# Altium PCB C-POWER.PcbDoc
Units mil, origin at the board's own origin, x right, y up, seen from the top; angles counter-clockwise.
Board outline 2956.75 x 2283.46 mil, 4 copper layers (Top Layer, power, GND, Bottom Layer), stack 23.078 mil thick; 72 components, 39 nets, 229 pads, 113 vias.
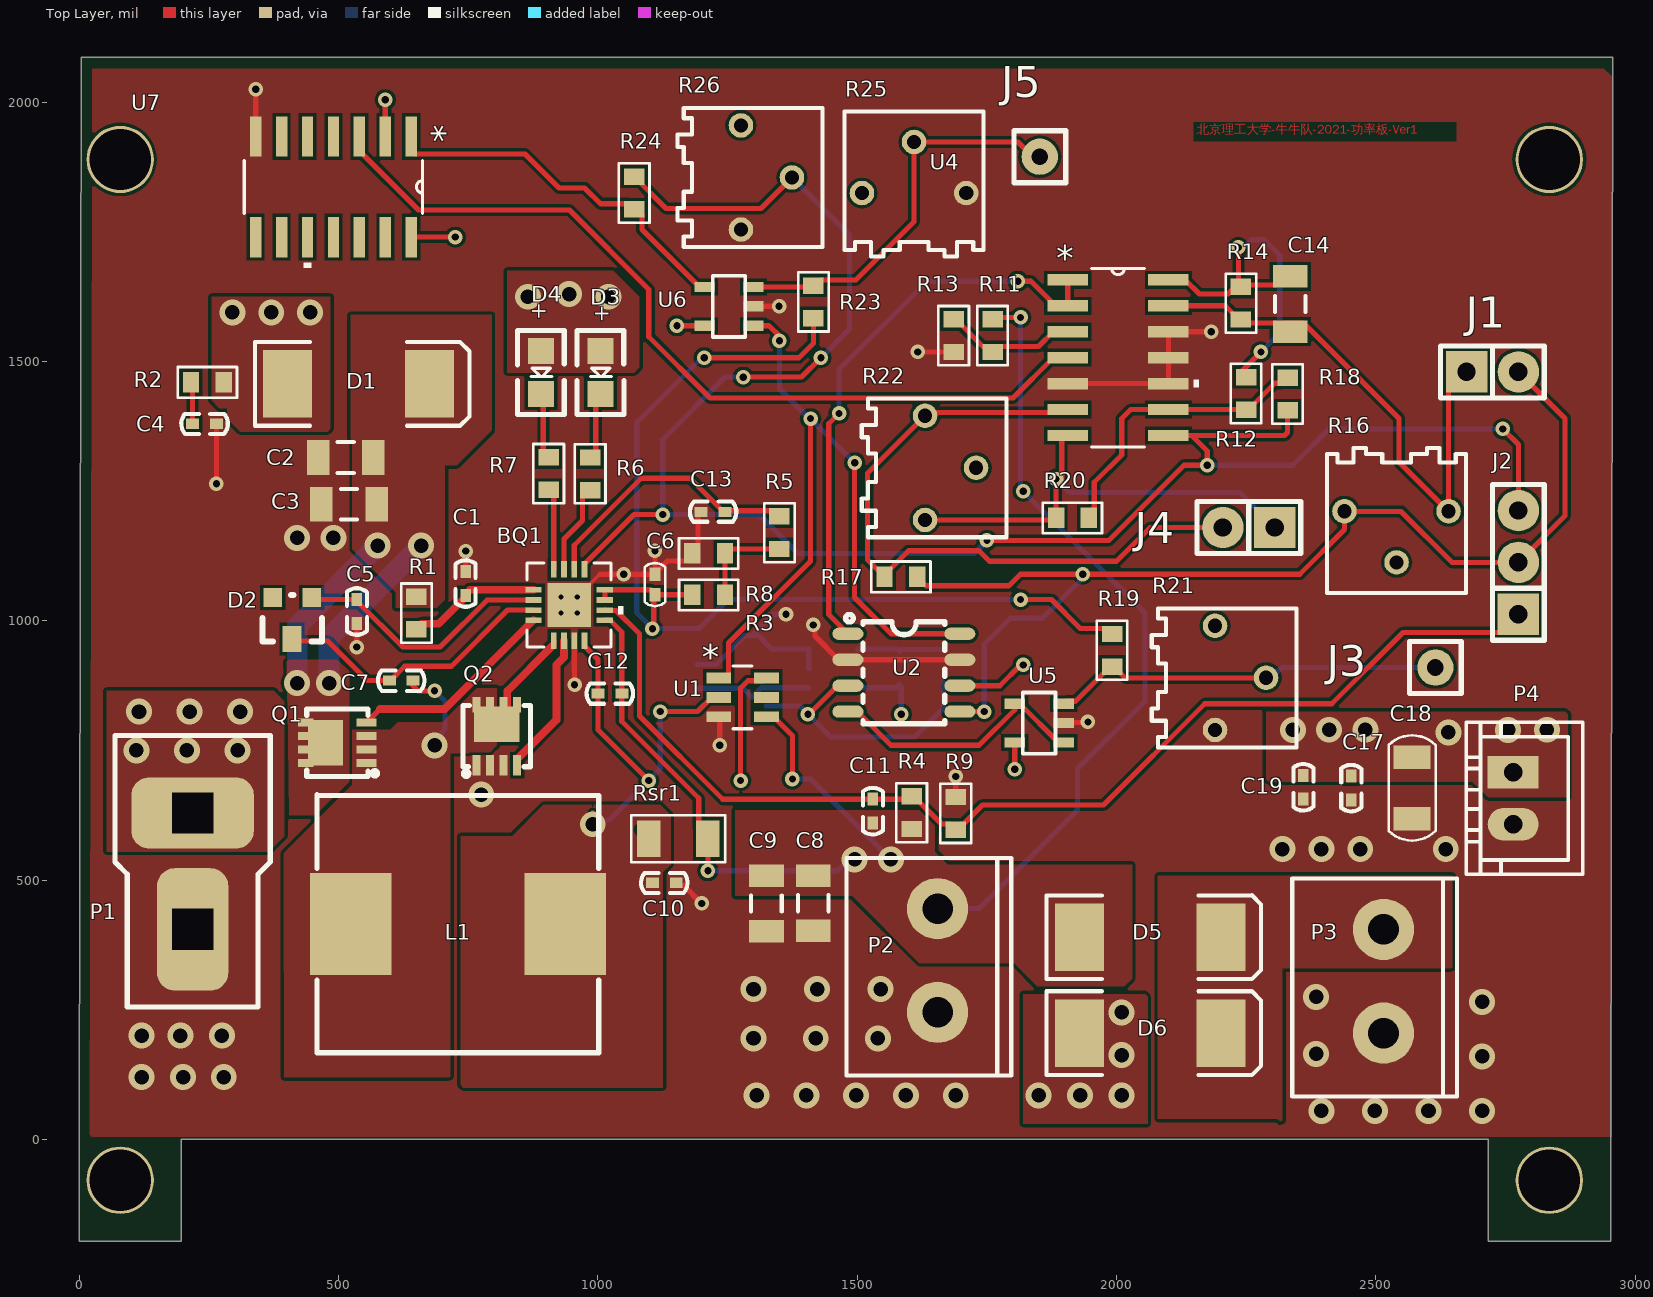
[diagram p0: Top Layer view]
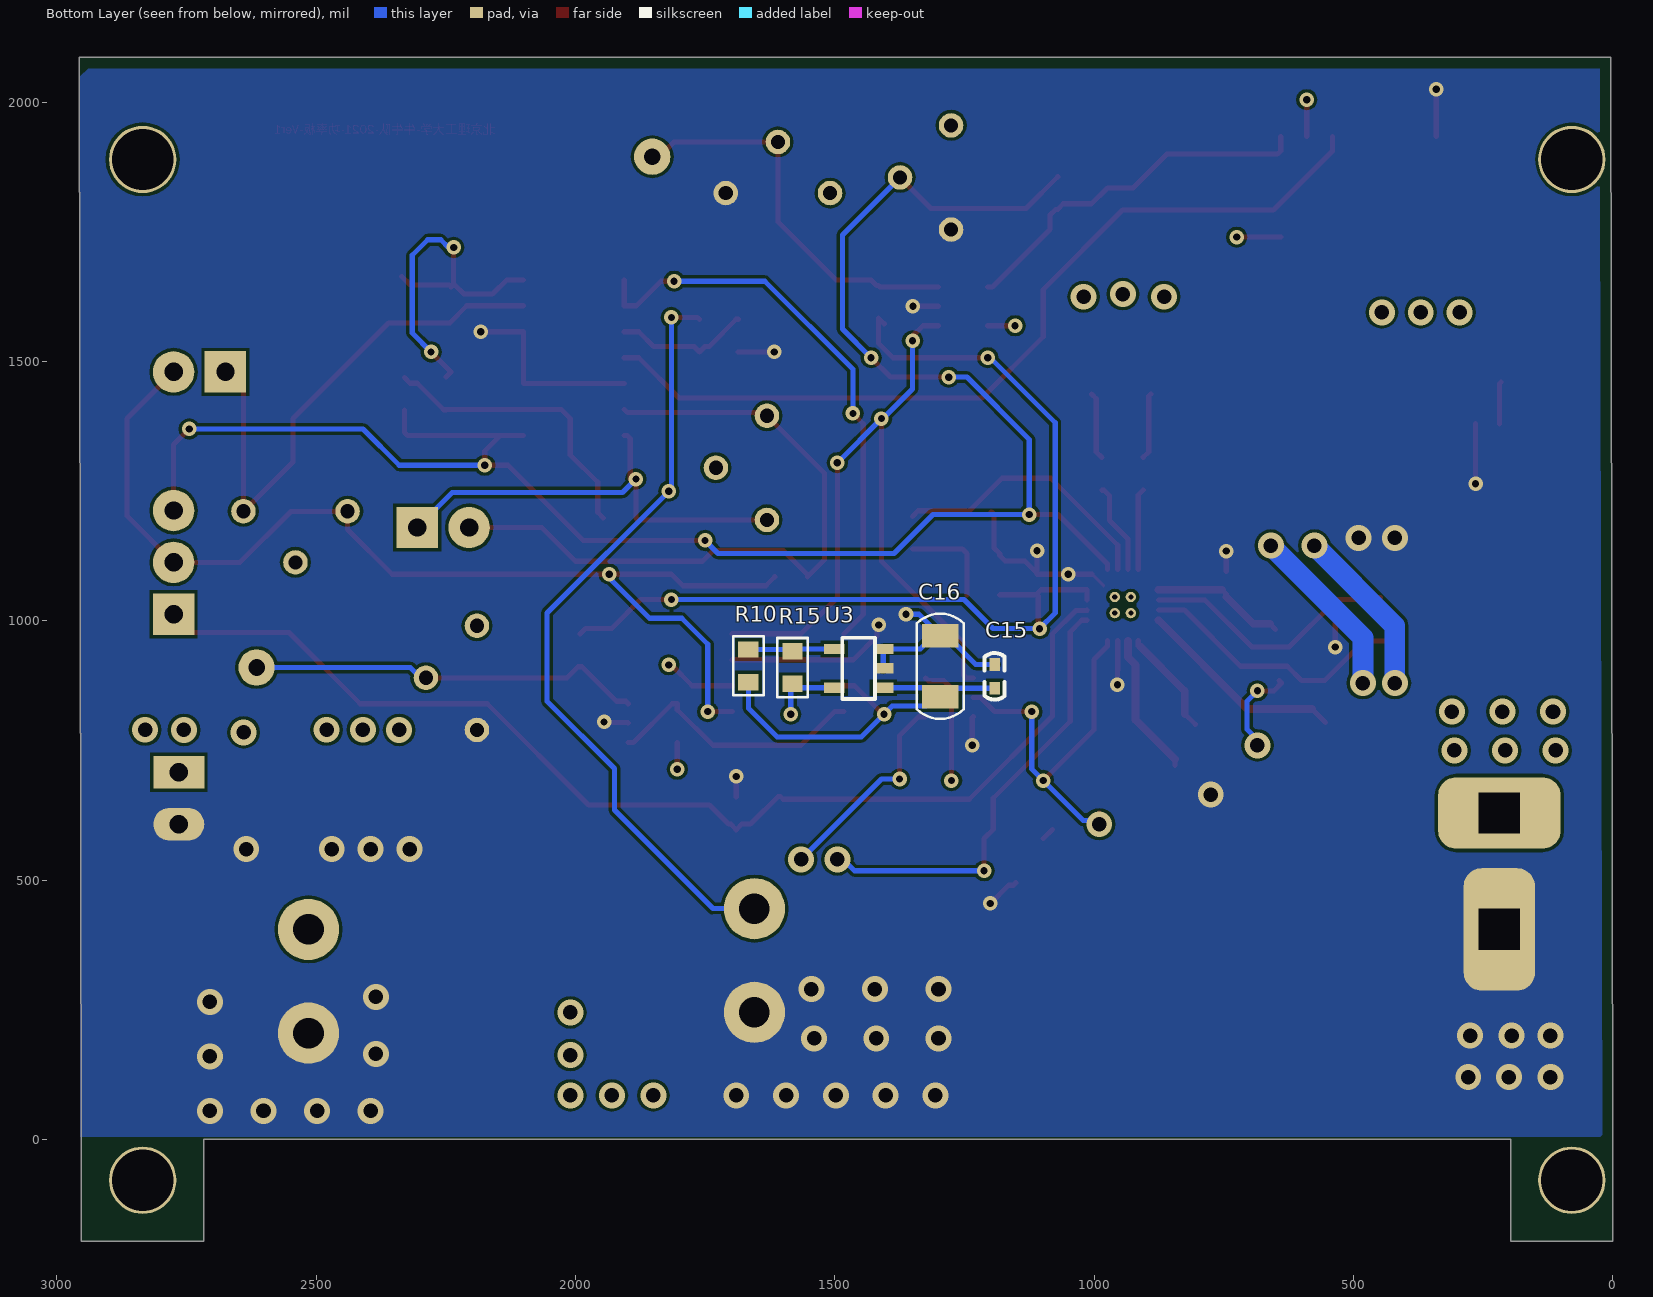
[diagram p1: Bottom Layer view, seen from below]
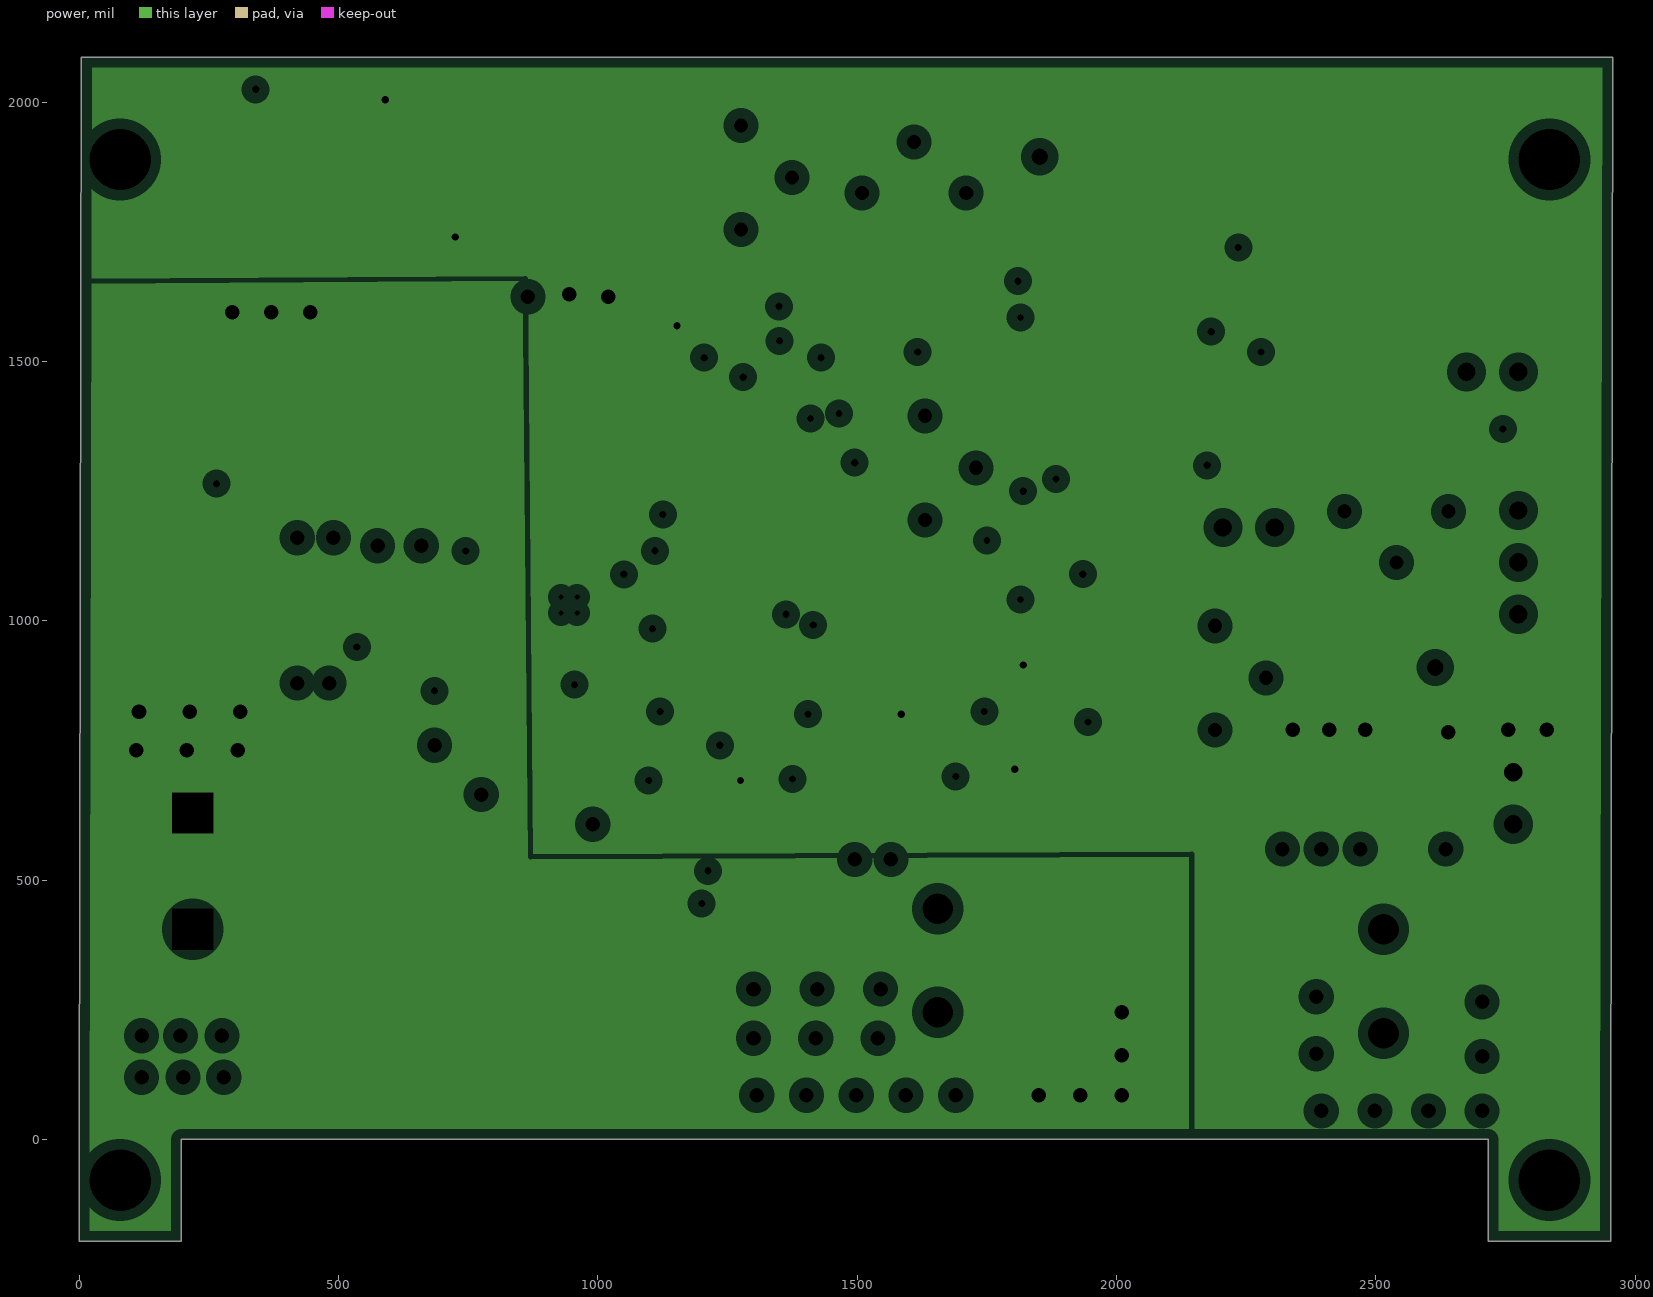
[diagram p2: power, clearances drawn from the general rule]
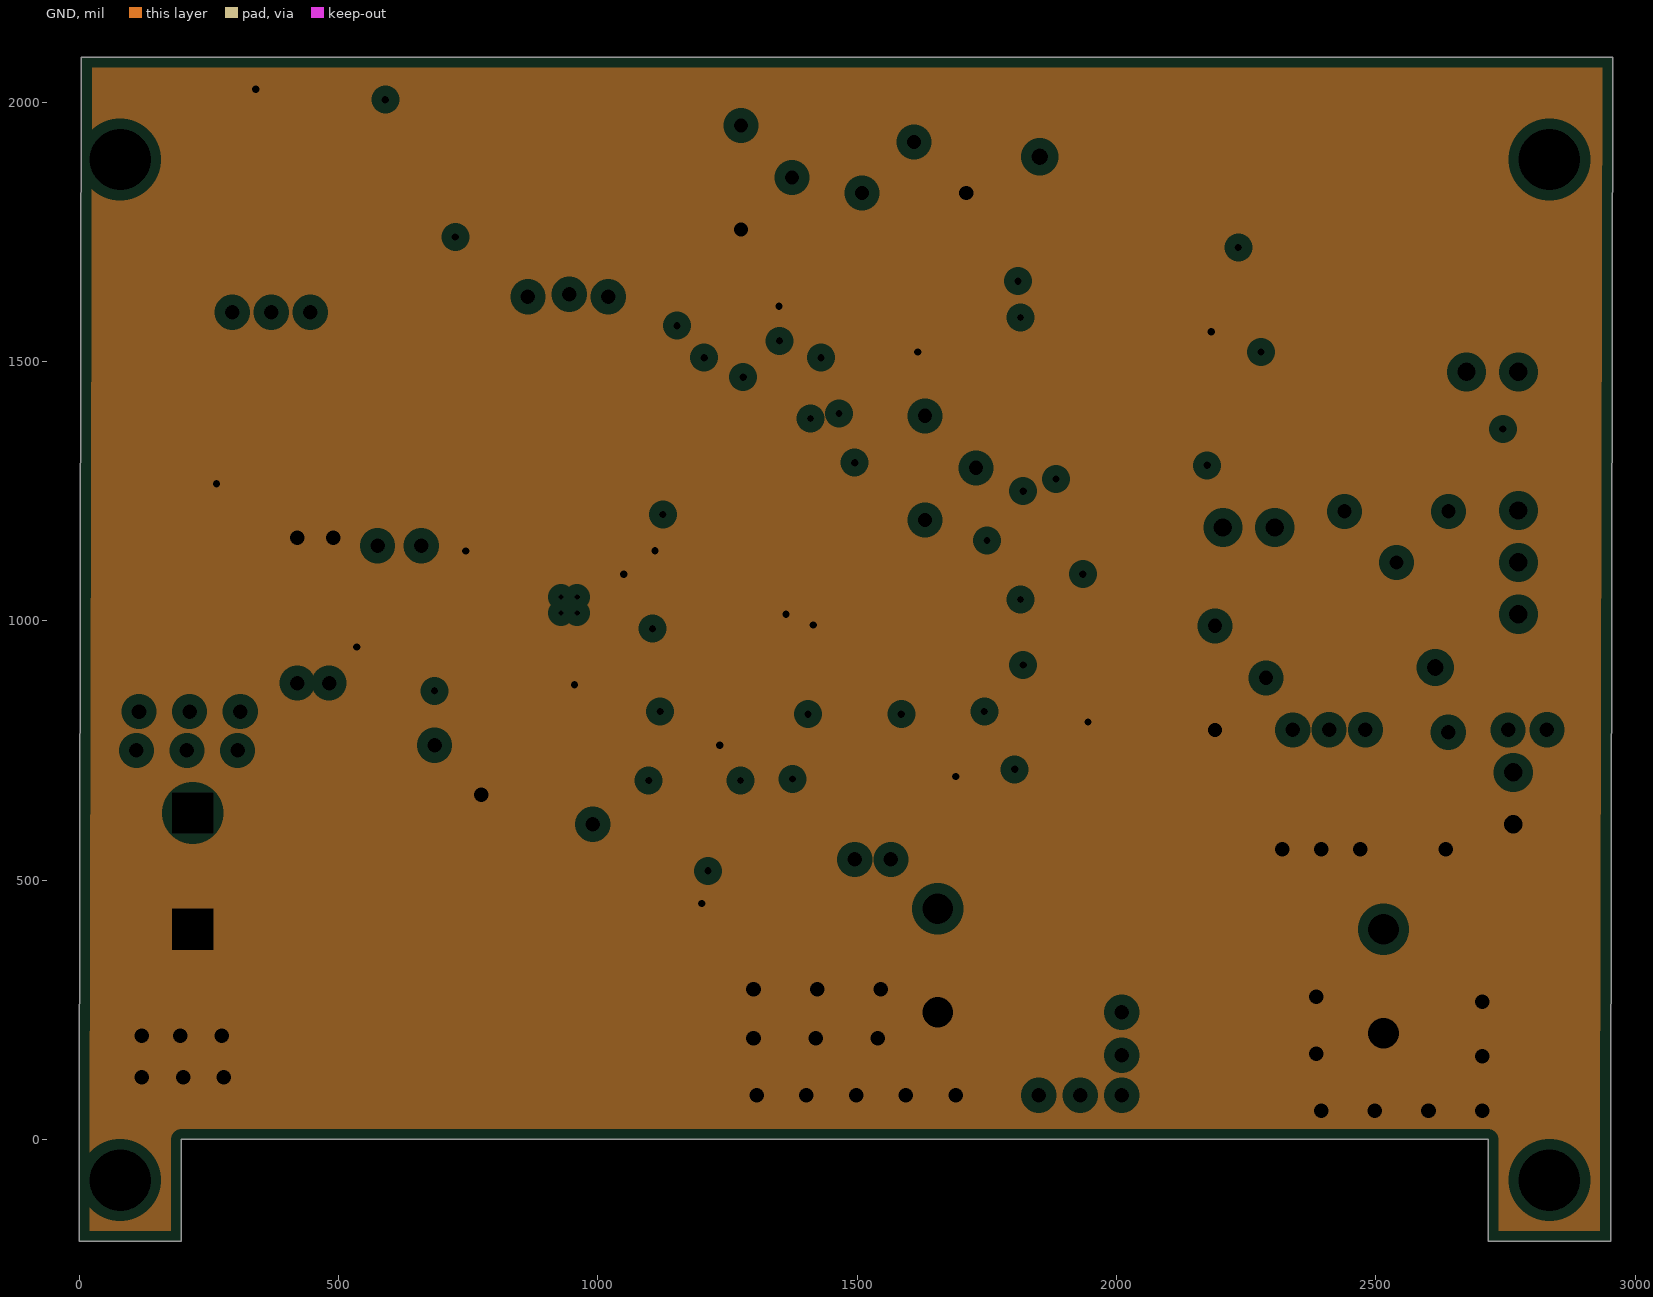
[diagram p3: GND, clearances drawn from the general rule]

## Layer stack, top to bottom
Top Solder: solder mask 0.4, Solder Resist, Dk 3.5
Top Layer: signal copper 1.4
Dielectric 2: prepreg 2.8, PP-006, Dk 4.1
power: plane copper 0.7, net (Multiple Nets)
Dielectric 3: prepreg 2.8, PP-006, Dk 4.1
GND: plane copper 1.3778, net GND
Dielectric 1: dielectric 12.6, FR-4, Dk 4.8
Bottom Layer: signal copper 1.4
Bottom Solder: solder mask 0.4, Solder Resist, Dk 3.5

## Board outline
0,-196.85 0,0 3.99,2086.61 2956.75,2086.61 2952.76,0 2952.76,-196.85 2716.54,-196.85 2716.54,0 196.85,0 196.85,-196.85

## Design rules (kind name [scope] priority, off if disabled: settings)
Clearance [All] p1: gap=6 ignorepadtopadclearanceinfootprint=TRUE
HoleSize [All] p1: absolutevalues=TRUE maxlimit=2000 minlimit=1 maxpercent=80.000 minpercent=20.000
HoleToHoleClearance [All] p1: gap=2 allowstackedmicrovias=TRUE
MinimumSolderMaskSliver [All] p1: minsoldermaskwidth=0
PlaneClearance [All] p1: clearance=20
PlaneConnect [All] p1: planeconnectstyle=Direct reliefexpansion=20 reliefentries=4 reliefconductorwidth=10 reliefairgap=10
PolygonConnect [All] p1: connectstyle=Direct reliefconductorwidth=10 reliefentries=4 polygonreliefangle="90 Angle" airgapwidth=10
RoutingVias [All] p1: holewidth=14 width=28 viastyle="Through Hole" minholewidth=6 minwidth=6 maxholewidth=28 maxwidth=50
SilkToSilkClearance [All] p1: silktosilkclearance=2
SilkToSolderMaskClearance [IsPad] p1: minsilkscreentomaskgap=2 clearancetoexposedcopper=TRUE
SolderMaskExpansion [All] p1: expansion=4
Width [All] p1: maxlimit=200 minlimit=6 preferedwidth=10 minimp=50.000000 maximp=50.000000 favimp=50.000000
23 further rules are at their usual default settings.

## Components (designator, comment, footprint, x,y, rotation, side; value= is the part's Value field where it differs from the comment)
BQ1 "BQ24640" RVA16_2P14X2P14 944.5,1030.5 r0 top locked
C1 "Cap" C0402 745,1050 r90 top value=1uF
C2 "Cap" C1206 513.4,1315 r0 top value=10uF
C3 "Cap" C1206 520,1225 r0 top value=10uF
C4 "Cap" C0402 263.41,1380 r180 top value=2.2uF
C5 "Cap" C0402 535,1040 r270 top value=1uF
C6 "Cap" 0402-C 1110,1070 r270 top value=1uF
C7 "Cap" C0402 642.62,885 r180 top value=0.1uF
C8 "Cap" C1206 1415.47,455.71 r90 top value=22uF
C9 "Cap" C1206 1325,455 r90 top value=22uF
C10 "Cap" C0402 1150,495 r180 top value=0.1uF
C11 "Cap" C0402 1530,655 r270 top value=22pF
C12 "Cap" C0402 1045,860 r180 top value=0.1uF
C13 "Cap" C0402 1200,1210 r0 top value=0.1uF
C14 "Cap" C1206 2335,1611 r90 top value=10uF
C15 "Cap" C0402 1191.6,871 r90 bottom value=0.1uF
C16 "Cap" 1206-C 1296.6,912.46 r90 bottom value=22uF
C17 "Cap" C0402 2452.5,699.43 r270 top value=0.1uF
C18 "Cap" 1206-C 2570,677.75 r270 top value=22uF
C19 "Cap" C0402 2360,701 r270 top value=0.1uF
D1 "D Schottky" SMC 538.4,1456.91 r0 top
D2 "D Schottky" SOT-23 448,1045 r180 top
D3 "LED0" LED0805 1004.8,1520 r270 top
D4 "LED0" LED0805 890,1520 r270 top
D5 "D Schottky" SMC 2065,390 r0 top
D6 "D Schottky" SMC 2065,205 r0 top
J1 "PIN2" SIP2 2675,1480 r0 top
J2 "PIN3" SIP3 2775,1012.69 r90 top
J3 "PIN1" SIP1 2615,910 r0 top
J4 "PIN2" SIP2 2305.18,1180 r180 top
J5 "PIN1" SIP1 1852.05,1895 r0 top
L1 "Inductor" IND-SMD_L13.8-W12.6_MHCC12050 730,415 r0 top value=3.3uH
P1 "Header 2" PCBComponent_1 368.02,779.02 r180 top
P2 "Header 2" 2PIN-5.08B 1655,445 r270 top
P3 "Header 2" 2PIN-5.08B 2515,405 r270 top
P4 "MHDR1X2" XH2-2.54 2765,657.75 r270 top
Q1 "NMOS-2" POWERPAK-1212-8_L3.0-W3.0-P0.65-LS3.3-BL 495,765 r90 top
Q2 "NMOS-2" POWERPAK-1212-8_L3.0-W3.0-P0.65-LS3.3-BL 805,780 r0 top
R1 "Res2" 0603-R 650,1015 r90 top value=10R
R2 "Res2" 0603-R 246.92,1460 r0 top value=2R
R3 "Res2" 0603-R 1213.5,1050 r0 top value=9.31K
R4 "Res2" 0603-R 1605,630 r90 top value=570K
R5 "Res2" 0603-R 1350,1170 r270 top value=100R
R6 "Res2" 0603-R 985,1283.5 r90 top value=16K
R7 "Res2" 0603-R 905,1284 r90 top value=16K
R8 "Res2" 0603-R 1213.5,1130 r180 top value=180K
R9 "Res2" 0603-R 1690,628.69 r90 top value=50K
R10 "Res2" 0603-R 1666.6,913.4 r270 bottom value=1k
R11 "Res2" 0603-R 1761,1550 r270 top value=510K
R12 "Res2" 0603-R 2250,1438.5 r270 top value=1K
R13 "Res2" 0603-R 1686,1550 r270 top value=100K
R14 "Res2" 0603-R 2240,1612.5 r270 top value=1M
R15 "Res2" 0603-R 1581.6,909.9 r90 bottom value=1k
R16 "Res Tap" 3362P 2540,1161.9 r180 top value=100K
R17 "Res2" 0603-R 1584.16,1085 r180 top value=1K
R18 "Res2" 0603-R 2330,1437.5 r90 top value=1K
R19 "Res2" 0603-R 1991.5,943.11 r90 top value=5.1K
R20 "Res2" 0603-R 1915,1198.5 r0 top value=1K
R21 "Res Tap" 3362P 2239.21,890 r270 top value=20K
R22 "Res Tap" 3362P 1680,1295 r270 top value=20K
R23 "Res2" 0603-R 1415.47,1615 r270 top value=5K
R24 "Res2" 0603-R 1070,1825 r270 top value=68K
R25 "Res Tap" 3362P 1609.61,1874.21 r0 top value=20K
R26 "Res Tap" 3362P 1325,1855 r270 top value=20K
Rsr1 "Res2" 1206-R 1155,580 r180 top value=10m
U1 "LMP8640MK-F/NOPB" MK06A 1279,852.4 r0 top
U2 "SOIP" SOIC-8_L4.9-W3.9-P1.27-LS6.0-TL 1590,900 r0 top
U3 "TS951LT" SOT23-5 1406.6,871 r90 bottom
U4 "TL064CD" D14 2003,1507.5 r0 top locked
U5 "TS951LT" SOT23-5 1898.17,765.35 r90 top
U6 "LM397MF" SOT23-5 1300,1569.09 r90 top
U7 "CD4011BM" D14 490,1837 r270 top

## Footprints (in the part's own frame and the unit in brackets; to place one, negate y for a bottom-side part, rotate by r counter-clockwise, add the part's x,y. Pads: shape width x height; smd on the part's side, far side on the other; paste and mask are expansions set on the pad)
2PIN-5.08B [mm] "3A"
  round 3 hole 1.5: 1(0,0) 2(5.08,0)
  silkscreen extent -2.49,-4.47 8.18,3.61, body extent -2.48,-4.58 8.12,3.02, height 10
0402-C [mm]
  rect 0.65x0.55 smd: 1(-0.5,0) 2(0.5,0)
  silkscreen extent -1.06,-0.5 1.06,0.5
0603-R [mm]
  rect 0.8x1 smd: 1(-0.8,0) 2(0.8,0)
  silkscreen extent -1.45,-0.75 1.45,0.75
1206-C [mm]
  rect 1.15x1.8 smd: 1(-1.5,0) 2(1.5,0)
  silkscreen extent -2.58,-1.15 2.58,1.15
1206-R [mm]
  rect 1.15x1.8 smd: 1(-1.45,0) 2(1.45,0)
  silkscreen extent -2.3,-1.15 2.3,1.15
3362P [mm]
  round 1.2 hole 0.7: 1(-2.55,-1.25) 2(0,1.25) 3(2.55,-1.25)
  silkscreen extent -3.4,-4.35 3.4,2.75
C0402 [mil]
  rect 25x20 smd: 1(-1,0) 2(45,0)
  silkscreen extent -23,-19 67,20, body extent 2,-10 42,10, height 20
C1206 [mm] "Chip Capacitor, Body 3.2x1.6mm, IPC High Density"
  rect 1.1x1.7 smd: 1(-1.35,0) 2(1.35,0)
  silkscreen extent -0.4,-0.75 0.4,0.75, body extent -1.7,-0.9 1.7,0.9, height 1.3
D14 [mil]
  rect 78x22 smd: 1(-97,150) 2(-97,100) 3(-97,50) 4(-97,0) 5(-97,-50) 6(-97,-100) 7(-97,-150) 8(97,-150) 9(97,-100) 10(97,-50) 11(97,0) 12(97,50) 13(97,100) 14(97,150)
  silkscreen extent -51,-172 156,172, body extent 0,0 10,10, height 10
IND-SMD_L13.8-W12.6_MHCC12050 [mm]
  rect 4x5 smd: 1(-5.25,0) 2(5.25,0)
  silkscreen extent -6.9,-6.3 6.9,6.35
LED0805 [mil] "1/8W"
  rect 50x50 smd: 1(0,0) 2(82.3,0.2)
  silkscreen extent -40,-45 122,45, body extent 2,-25 80,25, height 20
MK06A [mil]
  rect 48x21 smd: 1(-46,37.4) 2(-46,0) 3(-46,-37.4) 4(46,-37.4) 5(46,0) 6(46,37.4)
  silkscreen extent -18,-60 18,60, body extent 0,0 10,10, height 10
PCBComponent_1 [mm]
  rrect50% 6x3.5 hole 2 square: 1(3.8,3.8)
  rrect50% 3.5x6 hole 2 square: 2(3.8,9.5)
  silkscreen extent 0,0 7.6,13.3
POWERPAK-1212-8_L3.0-W3.0-P0.65-LS3.3-BL [mil]
  rect 16x39 smd: 1(39,-58.5) 3(-39,-58.5) 3(-13,-58.5) 3(13,-58.5)
  rect 16x30 smd: 2(-39,58.5) 2(-13,58.5) 2(13,58.5) 2(39,58.5)
  rect 88x68 smd: 2(0,20.5)
  silkscreen extent -65,-80 65,57
RVA16_2P14X2P14 [mm]
  rect 0.8x0.28 smd paste-0.14: 1(-1.75,0.75) 2(-1.75,0.25) 3(-1.75,-0.25) 4(-1.75,-0.75) 9(1.75,-0.75) 10(1.75,-0.25) 11(1.75,0.25) 12(1.75,0.75)
  rect 0.28x0.8 smd paste-0.14: 5(-0.75,-1.75) 6(-0.25,-1.75) 7(0.25,-1.75) 8(0.75,-1.75) 13(0.75,1.75) 14(0.25,1.75) 15(-0.25,1.75) 16(-0.75,1.75)
  rect 2.14x2.14 smd paste-1.057 mask-1.054: 17(0,0)
  round 0.508 hole 0.254: V(-0.394,-0.394) V(-0.394,0.394) V(0.394,-0.394) V(0.394,0.394)
  silkscreen extent -2.06,-2.06 2.66,2.06, body extent 0,0 0.25,0.25, height 0.25
SIP1 [mil]
  round 70 hole 32: 1(0,0)
  silkscreen extent -50,-50 50,50
SIP2 [mil]
  rect 80x80 hole 35.43: 1(0,0)
  round 80 hole 35.43: 2(100,0)
  silkscreen extent -50,-50 150,50
SIP3 [mil]
  rect 80x80 hole 35.43: 1(0,0)
  round 80 hole 35.43: 2(100,0) 3(200,0)
  silkscreen extent -50,-50 250,50
SMC [mm] "DO-214-AB/SMC; 2 C-Bend Leads; Body 7.9 x 5.9 mm, inc. leads (LxW)"
  rect 2.4x3.3 smd: 1(-3.475,0) 2(3.475,0)
  silkscreen extent -5.07,-2.05 5.43,2.05
SOIC-8_L4.9-W3.9-P1.27-LS6.0-TL [mm]
  oval 1.52x0.6 smd: 1(-2.74,1.905) 2(-2.74,0.635) 3(-2.74,-0.635) 4(-2.74,-1.905) 5(2.74,-1.905) 6(2.74,-0.635) 7(2.74,0.635) 8(2.74,1.905)
  silkscreen extent -2.86,-2.5 2,2.86
SOT23-5 [mm]
  rect 0.5x1 smd: 1(0,0) 2(0.95,0) 3(1.9,0) 4(1.9,2.4) 5(0,2.4)
  silkscreen extent -0.55,0.4 2.45,2, body extent -0.5,-0.2 2.4,2.6, height 1.09
SOT-23 [mil]
  rect 36x36 smd: 1(0,0) 2(75,0)
  rect 36x50 smd: 3(38,80)
  silkscreen extent -20,-5 95,85
XH2-2.54 [mm]
  rect 1.6x2.5 hole 0.9: 1(-1.27,0)
  oval 1.6x2.5 hole 0.9: 2(1.27,0)
  silkscreen extent -3.72,-2.3 3.72,3.4

## Part data
C1 C2 C3 C4 C5 C6 C7 C8 C9 C10 C11 C12 C13 C14 C15 C16 C17 C18 C19: "Capacitor", LatestRevisionDate=17-Jul-2002, LatestRevisionNote="Re-released for DXP Platform.", PackageDescription="Radial Cap, Thru-Hole; 2 Leads; 0.3 in Pin Spacing", PackageReference=RAD-0.3, Published=8-Jun-2000, Publisher="Altium Limited"
D1: "MBRS540T3G", Code_JEDEC=DO-214-AA, LatestRevisionDate=17-Jul-2002, LatestRevisionNote="Re-released for DXP Platform.", PackageDescription="DO-214-AA/SMB; 2 C-Bend Leads; Body 5.3 x 3.6 mm, inc. leads (LxW)", PackageReference=SMB, Published=8-Jun-2000, Publisher="Altium Limited"
D2: "Schottky Diode", Code_JEDEC=DO-214-AA, LatestRevisionDate=17-Jul-2002, LatestRevisionNote="Re-released for DXP Platform.", PackageDescription="DO-214-AA/SMB; 2 C-Bend Leads; Body 5.3 x 3.6 mm, inc. leads (LxW)", PackageReference=SMB, Published=8-Jun-2000, Publisher="Altium Limited"
D3 D4: "Typical INFRARED GaAs LED", LatestRevisionDate=08-Jul-2005, LatestRevisionNote="Mech Layer 1 removed.", PackageDescription="LED; 2 Leads", PackageReference=LED-0, Published=8-Jun-2000, Publisher="Altium Limited"
D5 D6: "SK86C", Code_JEDEC=DO-214-AA, LatestRevisionDate=17-Jul-2002, LatestRevisionNote="Re-released for DXP Platform.", PackageDescription="DO-214-AA/SMB; 2 C-Bend Leads; Body 5.3 x 3.6 mm, inc. leads (LxW)", PackageReference=SMB, Published=8-Jun-2000, Publisher="Altium Limited"
P1 P2 P3 P4: "Header, 2-Pin", LatestRevisionDate=17-Jul-2002, LatestRevisionNote="Re-released for DXP Platform.", Publisher="Altium Limited"
Q1 Q2: "N-Channel Power MOSFET", ComponentLink1Description="Manufacturer Link", ComponentLink1URL=http://www.irf.com/, DatasheetVersion=PD-9.814, LatestRevisionDate=17-Jul-2002, LatestRevisionNote="Re-released for DXP Platform.", Note="Pin 2 is electrically connected to pin 4.", PackageDescription="TO, Thru-Hole, Vertical, Heatsink Mounted; 3 In-Line Leads; Pitch 2.54 mm", PackageReference=TO-220AB, PackageVersion=Feb-1997, Published=8-Jun-2000, Publisher="Altium Limited"
R1 R2 R3 R4 R5 R6 R7 R8 R9 R10 R11 R12 R13 R14 R15 R17 R18 R19 R20 R23 R24 Rsr1: "Resistor", LatestRevisionDate=17-Jul-2002, LatestRevisionNote="Re-released for DXP Platform.", PackageDescription="Axial Device, Thru-Hole; 2 Leads; 0.4 in Pin Spacing", PackageReference=AXIAL-0.4, Published=8-Jun-2000, Publisher="Altium Limited"
R16 R21 R22 R25 R26: "Tapped Resistor", LatestRevisionDate=17-Jul-2002, LatestRevisionNote="Re-released for DXP Platform.", PackageDescription="Variable Resistor, Thru-Hole; 3 Leads", PackageReference=VR3, Published=24-Mar-1999, Publisher="Altium Limited", Set Position=0.5, Sim Note="Enter the Resistance value and the set point into parameter fields."
U1: "Precision High Voltage Current Sense Amplifier", Manufacturer="Texas Instruments", NSC_PackageReference=MK06A, basePN=LMP8640, Copyright="Copyright (C) 2018 Accelerated Designs. All rights reserved", DatasheetURL=http://www.ti.com/lit/ds/symlink/lmp8640.pdf, Manufacturer_Part_Number=LMP8640MK-F/NOPB, RefDes=RefDes, Type=DEV, Vendor="Texas Instruments"
U2: library part AD633, "乘法器"
U3 U5: library part OPA349
U4: "Quad Low-Power JFET-Input General-Purpose Operational Amplifier", Manufacturer="Texas Instruments", PACKAGE_DESIGNATOR=D, Copyright="Copyright (C) 2018 Accelerated Designs. All rights reserved", Datasheet_URL=http://www.ti.com/lit/gpn/TL064, FAMILY_NAME="STANDARD LINEAR AMPLIFIER", GENERIC_PART_NUMBER=TL064, INDUSTRY_STD_PKG_TYPE=SOIC, PIN_COUNT=14, RefDes=RefDes, Type=DEV
U6: "No Description Available", Manufacturer=NationalSemiconductor, Characteristics=LM397MFSingleGeneralPurposeComparator, ComponentLink1DescBC=LM397Datasheet, ComponentLink1URL=http//wwwnationalcom/ds/LM/LM397pdf, ComponentLink2DescA4=LM397WebPage, ComponentLink2URL=http//wwwnationalcom/pf/LM/LM397html, ComponentLink3DescAC=MF05APackageWebPage, ComponentLink3URL=http//wwwnationalcom/packaging/folders/mf05ahtml, CompType=ComparatorIC, Copyright="Copyright (C) 2018 Accelerated Designs. All rights reserved", LatestRevisionDate=2009-03-16, LatestRevisionNote=MassUpdate, PackageDescription=5LeadSOT-23, PackageReference=MF05A_L, PartNumber=LM397MF, Published=2009-03-16, Publisher=NationalSemiconductor, RoHS=O, SymbolVersion=2008-07-09, TaMax_C=850, TaMin_C=-400, Version=B1608
U7: "CMOS Quad 2-Input NAND Gate", Manufacturer="Texas Instruments", PACKAGE_DESIGNATOR=D, Copyright="Copyright (C) 2018 Accelerated Designs. All rights reserved", Datasheet_URL=http://www.ti.com/lit/gpn/CD4011B, FAMILY_NAME="NAND GATE", GENERIC_PART_NUMBER=CD4011B, INDUSTRY_STD_PKG_TYPE=SOIC, PIN_COUNT=14, RefDes=RefDes, Type=DEV
L1: Code_IEC=1005, Code_JEITA=0402, LatestRevisionDate=29-May-2009, LatestRevisionNote="IPC-7351 Footprint Added.", PackageDescription="Chip Inductor", PackageReference=0402-A, Published=8-Jun-2000, Publisher="Altium Limited"

## Free pads (board coordinates)
  round 129.92 hole 118.11: 4(78.74,-78.74) 4(78.74,1889.76) 4(2834.65,-78.74) 4(2834.65,1889.76)

## Via types
v1: diameter 50, hole 28, Top Layer to Bottom Layer, 63 vias
v2: diameter 28, hole 14, Top Layer to Bottom Layer, 50 vias

## Nets (pads, with @x,y where several pads share a name; then routed paths per layer and width w, separated by ;. In a path a pad name is that pad's centre, name@x,y a point inside that pad or via, vN(x,y) a via of type N, cw(c..) or ccw(c..) an arc to the next point about the centre after c; other vN are vias at no path point)
-Vs: C15.1 C16.1 R10.2 U2.3 U3.1 | length 779.5
  Top Layer w10: v2(1405,820) 1407.01,820 1462.01,875 U2.3
  Bottom Layer w10: C15.1 1280,870 C16.1 ; C16.1@1306.77,853.4 C16.1 ; C16.1@1324.4,835.76 1389.24,835.76 v2(1405,820) 1449.02,775.98 1610.98,775.98 1666.6,831.6 R10.2 ; U3.1 1314.2,871 C16.1
GND: BQ1.7 BQ1.17 C1.2 C2.1 C3.1 C4.1 C5.2 C6.1 C8.1 C9.1 C10.1 C13.1 C15.2 C16.2 C17.2 C18.2 C19.2 P1.2 P2.2 P3.2 P4.2 Q2.3 R8.2 R9.2 R13.2 R21.3 R25.3 R26.3 U1.3 U2.2 U2.7 U3.2 U3.3 U4.5 U4.10 U4.11 U4.12 U5.2 U6.2 U7.7 | length 2133.7
  Top Layer w6: BQ1.17@981.63,1067.63 1003.68,1089.68
  Top Layer w10: v2(264.41,1264.41) C4.1 ; U7.7 v2(340,2025) ; v2(535,949.34) C5.2 ; C1.2 v2(745,1134.5) ; BQ1.7 954.35,905.65 955,906.31 v2(955,876.8) ; 1003.68,1089.68 v2(1050,1089.68) C6.1 C6.1@1110,1091.65 ; v2(1110,1135) C6.1@1110,1091.65 ; C10.1 1156,490 1165,490 v2(1200,455) ; C13.1 1197.76,1210 1192.76,1205 1192.76,1140.75 R8.2 1182.01,1126.06 1171.26,1115.32 1133.66,1115.32 C6.1@1110,1091.65 ; U1.3 1235,813 v2(1235,760) ; U6.2 v2(1349.3,1606.5) ; v2(1415,992.13) 1418.44,988.68 1418.44,970.57 1464.02,925 U2.2 U2.7 ; v2(1616.5,1518.5) R13.2 ; R9.2 v2(1690,700) ; U5.2 1899.3,803.88 1943.88,803.88 v2(1945,805) ; U4.5 U4.10 U4.11 U4.12 v2(2182.5,1557.5)
  Bottom Layer w10: C15.2 1228.29,916 1283.8,971.51 C16.2 ; v2(1362.69,1012.69) 1337.78,1012.69 C16.2 ; U3.2 U3.3 1335.1,945.8 1309.39,971.51 C16.2
  other v1: 2395,55 2498.33,55 2601.67,55 2705,55 1306.02,85 1402.01,85 1498.01,85 1594,85 1690,85 120,120 200,120 278.41,120 2705,160 2385,165 1300,195 1420,195 1540,195 120,200 195,200 275,200 2705,265 2385,275 1300,290 1422.5,290 1545,290 2320,560 2395,560 2470,560 2635,560 775,665 420,1160 490,1160
IFB: U1.1 U2.8 U6.1 | length 1437.3
  Top Layer w10: U1.1 1246.5,889.8 1252,895.3 1252,957 1410,1115 v2(1410,1390) ; U6.1 1330,1569.09 1350,1549.09 v2(1350,1540) ; v2(1495,1305) 1495,1045 1565,975 U2.8
  Bottom Layer w10: v2(1350,1540) 1350,1447.31 1407.31,1390 v2(1410,1390) v2(1495,1305)
ISET: BQ1.13 J2.3 R18.1 R24.1 R26.2 U4.8 | length 3751.9
  Top Layer w10: BQ1.13 974.04,1109.63 1069.4,1205 v2(1125,1205) ; R24.1 1131.5,1795 1314.21,1795 R26.2 ; v2(1280,1470) 1392.5,1470 v2(1430,1507.5) ; v2(1750.26,1155) 1985,1155 2130,1300 v2(2175,1300) 2175,1327.5 2145,1357.5 ; U4.8 2145,1357.5 ; R18.1 2330,1363.36 2324.14,1357.5 2145,1357.5 ; v2(2745,1370) 2775,1340 J2.3
  Bottom Layer w10: v2(1280,1470) 1245,1470 1125,1350 v2(1125,1205) 1310.78,1205 1385.78,1130 1725.26,1130 v2(1750.26,1155) ; R26.2 1485,1744.21 1485,1562.5 v2(1430,1507.5) ; v2(2175,1300) 2340,1300 2410,1370 v2(2745,1370)
NetBQ1_1: BQ1.1 C1.1 R1.1 | length 260.2
  Top Layer w10: R1.1 R1.1@660.75,994.25 ; C1.1@745,1046.5 C1.1 745,1051.5 C1.1@753.53,1060.03
  Top Layer w15: R1.1@660.75,994.25 692.75,994.25 C1.1@745,1046.5 ; C1.1@753.53,1060.03 BQ1.1
NetBQ1_2: BQ1.2 C5.1 D2.1 | length 506.4
  Top Layer w10: D2.1 452,1041 C5.1 535,1038.5 624.16,949.34 695.74,949.34 786.74,1040.34 BQ1.2
NetBQ1_3: BQ1.3 C7.2 D2.3 | length 554.9
  Top Layer w10: D2.3 414,961 479,961 555,885 C7.2 600.12,885 627.63,912.5 717.5,912.5 825.66,1020.66 BQ1.3
NetBQ1_4: BQ1.4 Q1.1 | length 403.7
  Top Layer w10: Q1.1 579.5,830
  Top Layer w15: 579.5,830 704.63,830 BQ1.4
NetBQ1_5: BQ1.5 C7.1 L1.1 Q1.3 Q2.2 | length 389.7
  Top Layer w10: C7.1 638.62,880 653.62,865 v2(685,865) ; Q2.2@805,800.5 Q2.2@825,820.5 ; BQ1.5@911.35,950.85 914.45,950.85 914.96,951.37 BQ1.5
  Top Layer w15: Q2.2@825,820.5 825,864.5 BQ1.5@911.35,950.85
  Bottom Layer w10: v1(685,760) 685,770.82 705,790.82 705,845 v2(685,865)
NetBQ1_6: BQ1.6 Q2.1 | length 277.7
  Top Layer w10: Q2.1 Q2.1@844,733
  Top Layer w15: Q2.1@844,733 920,809 920,915.35 934.65,930 BQ1.6
NetBQ1_14: BQ1.14 C13.2 R5.1 | length 528
  Top Layer w10: BQ1.14 954.35,1145.95 1083.4,1275 1177.5,1275 1242.5,1210 C13.2 1247.24,1212.24 1339.25,1212.24 R5.1
NetBQ1_15: BQ1.15 R6.1 | length 175.8
  Top Layer w10: BQ1.15 934.65,1157.62 970.32,1193.28 970.32,1241.26 981.06,1252.01 R6.1
NetBQ1_16: BQ1.16 R7.1 | length 157.2
  Top Layer w10: R7.1 914.96,1242.54 BQ1.16
NetC2_2: C2.2 C3.2 D1.2 Q1.2 R1.2 | length 667.8
  Bottom Layer w40: v1(420,880) 420,990 v1(575,1145) ; v1(481.5,880) 481.5,967.35 v1(659.15,1145)
NetC4_2: C4.2 R2.1 | length 81.2
  Top Layer w10: R2.1 218.41,1457.01 C4.2
NetC14_1: C14.1 J1.1 R14.2 R16.1 U4.13 | length 1036.9
  Top Layer w10: U4.13 2209.57,1607.5 2242.56,1574.51 2360.89,1574.51 2545,1390.39 2545,1306.51 R16.1 2640.39,1445.39 J1.1
NetC14_2: C14.2 R12.1 R14.1 U4.14 | length 703.9
  Top Layer w10: U4.14 2132.5,1657.5 2160,1630 2215,1630 2235,1650 v2(2235,1720) ; R14.1@2235,1649 R14.1 2243.5,1647.5 2318.35,1647.5 C14.2 ; R12.1 2240,1480 v2(2278.5,1518.5)
  Bottom Layer w10: v2(2235,1720) 2245,1720 2260,1735 2285,1735 2315,1705 2315,1555 v2(2278.5,1518.5)
NetD3_2: D3.2 R6.2 | length 131
  Top Layer w10: R6.2 995.75,1325.75 995.75,1428.45 D3.2
NetD4_2: D4.2 R7.2 | length 128.3
  Top Layer w10: D4.2 894.73,1433.17 894.73,1325.77 R7.2
NetD5_2: D5.2 D6.2 P3.1
NetJ3_1: J3.1 R19.1 R21.2 U5.3 | length 763.7
  Top Layer w10: U5.3 1903.02,845 1920.94,845 1987.56,911.61 R19.1 1995.44,911.61 2017.05,890 R21.2
  Bottom Layer w10: R21.2 2298.5,890 2318.5,910 J3.1
NetJ4_1: J4.1 R20.1 R22.3 U4.7 | length 882
  Top Layer w10: R22.3 1879.61,1194.61 R20.1 v2(1883.5,1273.5) ; v2@1894.25,1273.5 1894.25,1351.5 1900.25,1357.5 U4.7
  Bottom Layer w10: v2(1883.5,1273.5) 1909.51,1247.5 2237.68,1247.5 J4.1
NetJ4_2: J4.2 R17.2 R22.1 U4.6 | length 1356.8
  Top Layer w10: R17.2 1520,1117.66 1520,1284.61 R22.1 1636.89,1401.5 1900,1401.5 U4.6 ; R17.2@1552.66,1088.94 1598.72,1135 1734.9,1135 1754.9,1115 2000,1115 2065,1180 J4.2
NetJ5_1: J5.1 R23.1 R25.2 U6.3 | length 769.7
  Top Layer w10: U6.3 1412.87,1643.9 R23.1 1419.41,1646.5 1430.16,1657.24 1497.24,1657.24 1609.61,1769.61 R25.2 1809.77,1923.43 1838.19,1895 J5.1
NetR3_2: R3.2 R5.2 R8.1 | length 188.5
  Top Layer w10: R3.2 R8.1 1253.5,1138.5 R5.2
NetR10_1: R10.1 R15.2 U3.4 | length 168.8
  Bottom Layer w10: U3.4 1577.19,945.8 R15.2 1585.1,944.9 R10.1
NetR11_2: R11.2 R13.1 U4.3 | length 262.2
  Top Layer w10: R13.1 1689.94,1581.5 1742.19,1529.25 1750.26,1529.25 R11.2 1771.75,1529.25 1849.75,1529.25 1878,1557.5 U4.3
O: R12.2 R18.2 R20.2 U4.9 | length 570.9
  Top Layer w10: R20.2 1957.24,1209.25 1957.24,1267.24 2010,1320 2010,1390 2027.5,1407.5 U4.9 2249.51,1407.5 R12.2 2253.94,1407.01 2305.18,1458.25 2319.25,1458.25 R18.2
PI-POWER: U4.4 U7.3 | length 1676.7
  Top Layer w10: U7.3 540,1906 653.99,1792.01 945,1792.01 1097.91,1639.09 1097.91,1547.94 1215.86,1430 1616.43,1430 1645.13,1430.02 1800.5,1430 1878,1507.5 U4.4
POWER-BIAS: J1.2 J2.2 R16.3 R17.1 U2.5 | length 2156.4
  Top Layer w10: R17.1 1633.03,1067.63 1792.6,1067.63 1814.97,1090 v2(1935,1090) 2353.4,1090 2439.61,1176.2 R16.3 2548.89,1211.11 2647.31,1112.69 J2.2 2865,1202.69 2865,1390 J1.2 ; U2.5 v2(1745,825)
  Bottom Layer w10: v2(1745,825) 1745,955 1795,1005 1857.28,1005 1935,1082.72 v2(1935,1090)
POWER-REF: U2.4 U5.1 U5.4 | length 513.9
  Top Layer w10: U2.4 1500.24,825 1565.24,760 1735,760 1803.68,828.68 U5.4 1813.53,840.15 1888.33,765.35 U5.1
PVCC: D1.1 D6.1 P1.1 R2.2
  other v1: 1850,85 1930,85 2010,85 2010,162.5 2010,245 110,750 207.5,750 305,750 115,825 212.5,825 310,825 295,1595 370,1595 445,1595
SRN: BQ1.9 C8.2 C9.2 C11.2 C12.1 D5.1 P2.1 R4.1 R11.1 Rsr1.1 U1.4 | length 2773.6
  Top Layer w10: BQ1.9 1023.63,1000.97 1046,978.61 C12.1 1046,806.26 1194.45,657.81 1194.45,597.64 Rsr1.1 v2(1212.09,517.91) ; U1.4 1338.5,815 1375,778.5 v2(1375,695) ; R11.1 1764.51,1585 v2(1815,1585)
  Bottom Layer w10: v2(1212.09,517.91) 1462.09,517.91 1484.18,540 v1(1495,540) ; v2(1375,695) 1410,695 v1(1565,540) ; P2.1 1735,445 1925,635 1925,715 2055,845 2055,1015 v2(1820,1250) 1815,1255 v2(1815,1585)
SRP: BQ1.8 C10.2 C12.2 L1.2 Rsr1.2 U1.2 | length 781.2
  Top Layer w10: BQ1.8 974.04,951.37 1000,925.4 C12.2 1000,790 v2(1097.91,692.09) v2@1094.47,688.64 ; v1(990,607.75) v1@990,629 ; Rsr1.2@1080.28,597.64 Rsr1.2 ; v2(1120,825) 1192.1,825 1219.5,852.4 U1.2
  Bottom Layer w10: v1(990,607.75) 997.37,615.12 1020.95,615.12 v2(1097.91,692.09) 1120,714.17 v2(1120,825)
STOP: R24.2 U6.4 U7.1 | length 718.4
  Top Layer w10: U7.1 640,1906 646,1900 859.64,1900 924.64,1835 974.04,1835 1004.78,1804.25 1059.25,1804.25 R24.2 1073.94,1793.5 1084.68,1782.76 1084.68,1754.88 1195.67,1643.9 U6.4
VCC_12V: C17.1 C18.1 C19.1 D3.1 D4.1 P4.1 R15.1 U1.6 U2.6 U3.5 U5.5 U6.5 U7.2 U7.14 | length 780.3
  Top Layer w10: U7.2 v2(590,2005) ; U7.14 v2(725,1740) ; v2(1152.4,1569.09) U6.5 ; v2(1275,692.09) 1275,870 1289.3,884.3 1319.5,884.3 U1.6 ; U2.6 1775,875 1815,915 v2(1820,915) ; v2(1803.68,713.68) U5.5
  Bottom Layer w10: U3.5 1574.2,871 R15.1 1580,876.8 1585,871.8 v2(1585,820)
  other v1: 2640,785 2340,789.61 2410,790 2480,790 2755,789.61 2830,790 865,1625 1020,1625 944.5,1630
VFB: U2.1 U4.1 U4.2 | length 1114.8
  Top Layer w10: v2(1465,1400) 1445,1380 1445,1012.13 U2.1 ; v2(1810,1655) 1835,1655 1882.5,1607.5 U4.2 U4.1
  Bottom Layer w10: v2(1465,1400) 1465,1485 1635,1655 v2(1810,1655)
Voltage: BQ1.10 C11.1 J2.1 R4.2 R9.1 | length 2206.5
  Top Layer w10: BQ1.10 1013.91,1020.15 1034.85,1020.15 1080,975 1080,816.6 1240.6,656 C11.1 1599.5,656 R4.2 1608.94,661.5 1662.49,607.94 1679.25,607.94 R9.1 1700.75,607.94 1704.68,607.94 1741.74,645 1975,645 2170.15,840.15 2415.15,840.15 2552.69,977.69 2740,977.69 J2.1
VREF: BQ1.11 BQ1.12 C6.2 R3.1 R19.2 R23.2 | length 2081.3
  Top Layer w10: BQ1.11 BQ1.12 1102.26,1060.03 1110,1052.28 C6.2 ; v2(1105,985) 1107.5,987.5 1107.5,1047.82 C6.2 ; R3.1 1181.69,1050.32 C6.2 ; v2(1205,1507.5) 1387.5,1507.5 1415.47,1535.47 R23.2 R23.2@1404.72,1572.76 ; v2(1815,1041) 1874.5,1041 1930.15,985.35 1980.75,985.35 R19.2
  Bottom Layer w10: v2(1205,1507.5) 1205,1512.01 1075,1382.01 1075,1015 v2(1105,985) 1195,985 1251,1041 v2(1815,1041)
pads on no net: BQ1.V D2.2 R16.2 R21.1 R22.2 R25.1 R26.1 U1.5 U7.4 U7.5 U7.6 U7.8 U7.9 U7.10 U7.11 U7.12 U7.13

## Polygon pours and split planes (outlines as drawn)
GND on Top Layer "Top Layer-GND 6" (solid, remove dead copper, pour order 62): 25,2065 2940,2065 2955,2050 2955,5 20,5
SRP on Top Layer "Top Layer-SRP" (solid, pour order 56): 735,585 835,585 895,645 1120,645 1140,625 1140,530 1125,515 1125,100 740,100 735,105
no net on Top Layer "Top Layer-No Net" (solid, pour order 54): 735,552
NetC2_2 on Top Layer "Top Layer-NetC2_2 1" (solid, remove dead copper, pour order 50): 400,925 497.5,925 520,902.5 520,690 455,625 405,625
NetD5_2 on Top Layer "Top Layer-NetD5_2" (solid, remove dead copper, pour order 46): 2080,508.15 2080.71,508.86 2647.31,508.86 2647.31,327.69 2645,330 2320,330 2320,30 2310,40 2080,40
PVCC on Top Layer "Top Layer-PVCC 2" (solid, remove dead copper, pour order 44): 1820,280 2055,280 2060,275 2060,30 1820,30
SRN on Top Layer "Top Layer-SRN" (solid, remove dead copper, pour order 42): 1265,635 1620,635 1650,605 1650,555 1675,530 2030,530 2030,310 2015,295 1847.5,295 1802.5,340 1620,340 1490,470 1265,470
GND on Top Layer "Top Layer-GND" (solid, remove dead copper, pour order 34): 735,747.5 740,752.5 742.5,750 830,750 830,620 810,600 735,600
NetBQ1_5 on Top Layer "Top Layer-NetBQ1_5" (solid, remove dead copper, pour order 32): 394.5,525 394.5,552 526.49,683.99 526.49,789.61 599.61,789.61 614,804 700.25,804 766.25,870 805,870 805,760 790,745 715,745 715,117.5 712.5,120 395,120
VCC_12V on Top Layer "Top Layer-VCC_12V" (solid, remove dead copper, pour order 20): 825,1675 1030,1675 1080,1625 1080,1488.75 1070,1478.75 825,1478.75
NetC2_2 on Top Layer "Top Layer-NetC2_2" (solid, remove dead copper, pour order 18): 523.31,1590 523.31,1141.72 610,1055.03 610,1025 689.5,1025 705,1040.5 705,1300 727.5,1300 795,1367.5 795,1590
PVCC on Top Layer "Top Layer-PVCC" (solid, remove dead copper, pour order 16): 255,1625 484,1625 484,1370 479,1365 310,1365 285,1390 285,1410 270,1410 255,1425
GND on Top Layer "Top Layer-GND 1" (solid, remove dead copper, pour order 14): 380,1357.5 507.5,1357.5 520,1345 520,1104.68 505,1089.68 380,1089.68
PVCC on Top Layer "Top Layer-PVCC 1" (solid, remove dead copper, pour order 12): 52.5,865 375,865 395,845 395,585 365,555 52.5,555
VCC_12V on Top Layer "Top Layer-VCC_12V 1" (solid, remove dead copper, pour order 10): 2288.43,825 2865,825 2870,820 2870,660 2716.5,660 2686.5,690 2293.43,690 2288.43,695
GND on Top Layer "Top Layer-GND 2" (solid, remove dead copper, pour order 8): 2285,675 2675,675 2705,645 2880,645 2880,545 2860,525 2285,525
GND on Top Layer "Top Layer-GND 3" (solid, remove dead copper, pour order 6): 1245,450 1495,450 1620,325 1795,325 1805,315 1805,95 1750,40 1240.6,40
GND on Top Layer "Top Layer-GND 4" (solid, remove dead copper, pour order 4): 2340,315 2940,315 2945,310 2945,15 2330,15
GND on Top Layer "Top Layer-GND 5" (solid, remove dead copper, pour order 0): 50,545 350,545 350,60 325,35 90,35 90,40 55,75 50,75
GND on Bottom Layer "Bottom Layer-GND" (solid, pour order 64): 25,2065 2940,2065 2955,2050 2955,5 20,5
no net on Bottom Layer "Bottom Layer-No Net" (solid, pour order 58): 25,2065
PVCC on power (split plane): 864.9,544.95 865.1,544 865.3,543.03 865.31,543.02 865.31,543.01 865.86,542.2 866.41,541.38 866.42,541.37 866.43,541.36 867.25,540.83 868.07,540.28 868.08,540.28 868.09,540.27 869.05,540.09 870.02,539.9 2139.9,544.88 2139.9,20.1 196.85,20.1 192.93,19.71 189.16,18.57 185.69,16.71 182.64,14.21 180.14,11.17 178.28,7.69 177.14,3.92 176.75,0 176.75,-176.75 20.1,-176.75 20.1,-0.04 23.26,1650.02 854.95,1654.87
VCC_12V on power (split plane): 2932.66,0.04 2932.66,0.02 2932.66,0 2932.66,-176.75 2736.63,-176.75 2736.63,0 2736.25,3.92 2735.1,7.69 2733.25,11.17 2730.75,14.21 2727.7,16.71 2724.23,18.57 2720.46,19.71 2716.54,20.1 2150.1,20.1 2150.1,550 2150.1,550.01 2150.1,550.02 2149.9,550.99 2149.71,551.95 2149.7,551.96 2149.7,551.97 2149.15,552.78 2148.6,553.6 2148.6,553.61 2148.59,553.62 2147.77,554.16 2146.95,554.71 2146.94,554.71 2146.93,554.72 2145.96,554.91 2145,555.1 2144.99,555.1 2144.98,555.1 875.05,550.12 865.1,1660.05 864.9,1661.02 864.7,1661.98 864.69,1661.99 864.14,1662.81 863.58,1663.63 863.57,1663.64 862.75,1664.18 861.92,1664.72 861.91,1664.73 860.93,1664.91 859.97,1665.1 23.27,1660.21 24.05,2066.51 2936.61,2066.51
GND on GND (split plane): 2932.66,0.04 2932.66,0.02 2932.66,0 2932.66,-176.75 2736.63,-176.75 2736.63,0 2736.25,3.92 2735.1,7.69 2733.25,11.17 2730.75,14.21 2727.7,16.71 2724.23,18.57 2720.46,19.71 2716.54,20.1 196.85,20.1 192.93,19.71 189.16,18.57 185.69,16.71 182.64,14.21 180.14,11.17 178.28,7.69 177.14,3.92 176.75,0 176.75,-176.75 20.1,-176.75 20.1,-0.04 24.05,2066.51 2936.61,2066.51

## Other copper
Top Layer:
  text "北京理工大学-牛牛队-2021-功率板-Ver1" at 2155,1933.79 h30
power (plane layer: these items are gaps in the copper):
  lines w10: 3.85,1655 860,1660 870,545 2145,550 2145,-0.01

## Silkscreen, mask and mechanical layers (free items; w line width, h text height)
Mechanical 1:
  lines w10: -5,-196.85 ccw(c0,-196.85) 0,-201.85 ; -5,-196.85 ccw(c0,-196.85) 0,-201.85 ; -5,-196.85 -5,0 ; -5,0.01 ccw(c0,0) -5,0 ; -5,0.01 ccw(c0,0) -5,0 ; -5,0.01 -1.01,2086.62 ; -1.01,2086.62 cw(c3.99,2086.61) 3.99,2091.61 ; -1.01,2086.62 cw(c3.99,2086.61) 3.99,2091.61 ; 0,-201.85 196.85,-201.85 ; 3.99,2091.61 2956.75,2091.61 ; 196.85,-201.85 ccw(c196.85,-196.85) 201.85,-196.85 ; 196.85,-201.85 ccw(c196.85,-196.85) 201.85,-196.85 ; 201.85,-196.85 201.85,-5 2711.53,-5 2711.53,-196.85 ; 2711.53,-196.85 ccw(c2716.54,-196.85) 2716.54,-201.85 ; 2711.53,-196.85 ccw(c2716.54,-196.85) 2716.54,-201.85 ; 2716.54,-201.85 2952.76,-201.85 ; 2952.76,-201.85 ccw(c2952.76,-196.85) 2957.76,-196.85 ; 2952.76,-201.85 ccw(c2952.76,-196.85) 2957.76,-196.85 ; 2956.75,2091.61 cw(c2956.75,2086.61) 2961.75,2086.61 ; 2956.75,2091.61 cw(c2956.75,2086.61) 2961.75,2086.61 ; 2957.76,-196.85 2957.76,-0.01 ; 2957.76,-0.01 2961.75,2086.6 ; 2957.76,-0.01 2957.76,0 ; 2961.75,2086.6 ccw(c2956.75,2086.61) 2961.75,2086.61 ; 2961.75,2086.6 ccw(c2956.75,2086.61) 2961.75,2086.61

## Dimensions
78.74,1889.76 to 78.74,-78.74 on Mechanical 1
78.74,-78.74 to 2834.65,-78.74 on Mechanical 1

## Text inside footprints (layer, text, board x,y; h text height)
D3: Top Overlay "+" at 995,1575 h30 r270
D4: Top Overlay "+" at 873,1580 h30 r270
U1: Top Overlay "*" at 1200,905 h50; Mechanical 13 "*" at 1210.5,885.3 h50
U4: Top Overlay "*" at 1883.5,1674.5 h50; Mechanical 13 "*" at 1883.5,1674.5 h50
U7: Top Overlay "*" at 657,1956.5 h50 r270; Mechanical 13 "*" at 657,1956.5 h50 r270